# Altium PCB SuperCap-NEW_V1.4.PcbDoc
Units mm, origin at the board's own origin, x right, y up, seen from the top; angles counter-clockwise.
Board outline 100 x 75 mm, 4 copper layers (Top Layer, Signal Layer 1, Signal Layer 2, Bottom Layer), stack 0.778 mm thick; 110 components, 64 nets, 361 pads, 798 vias.
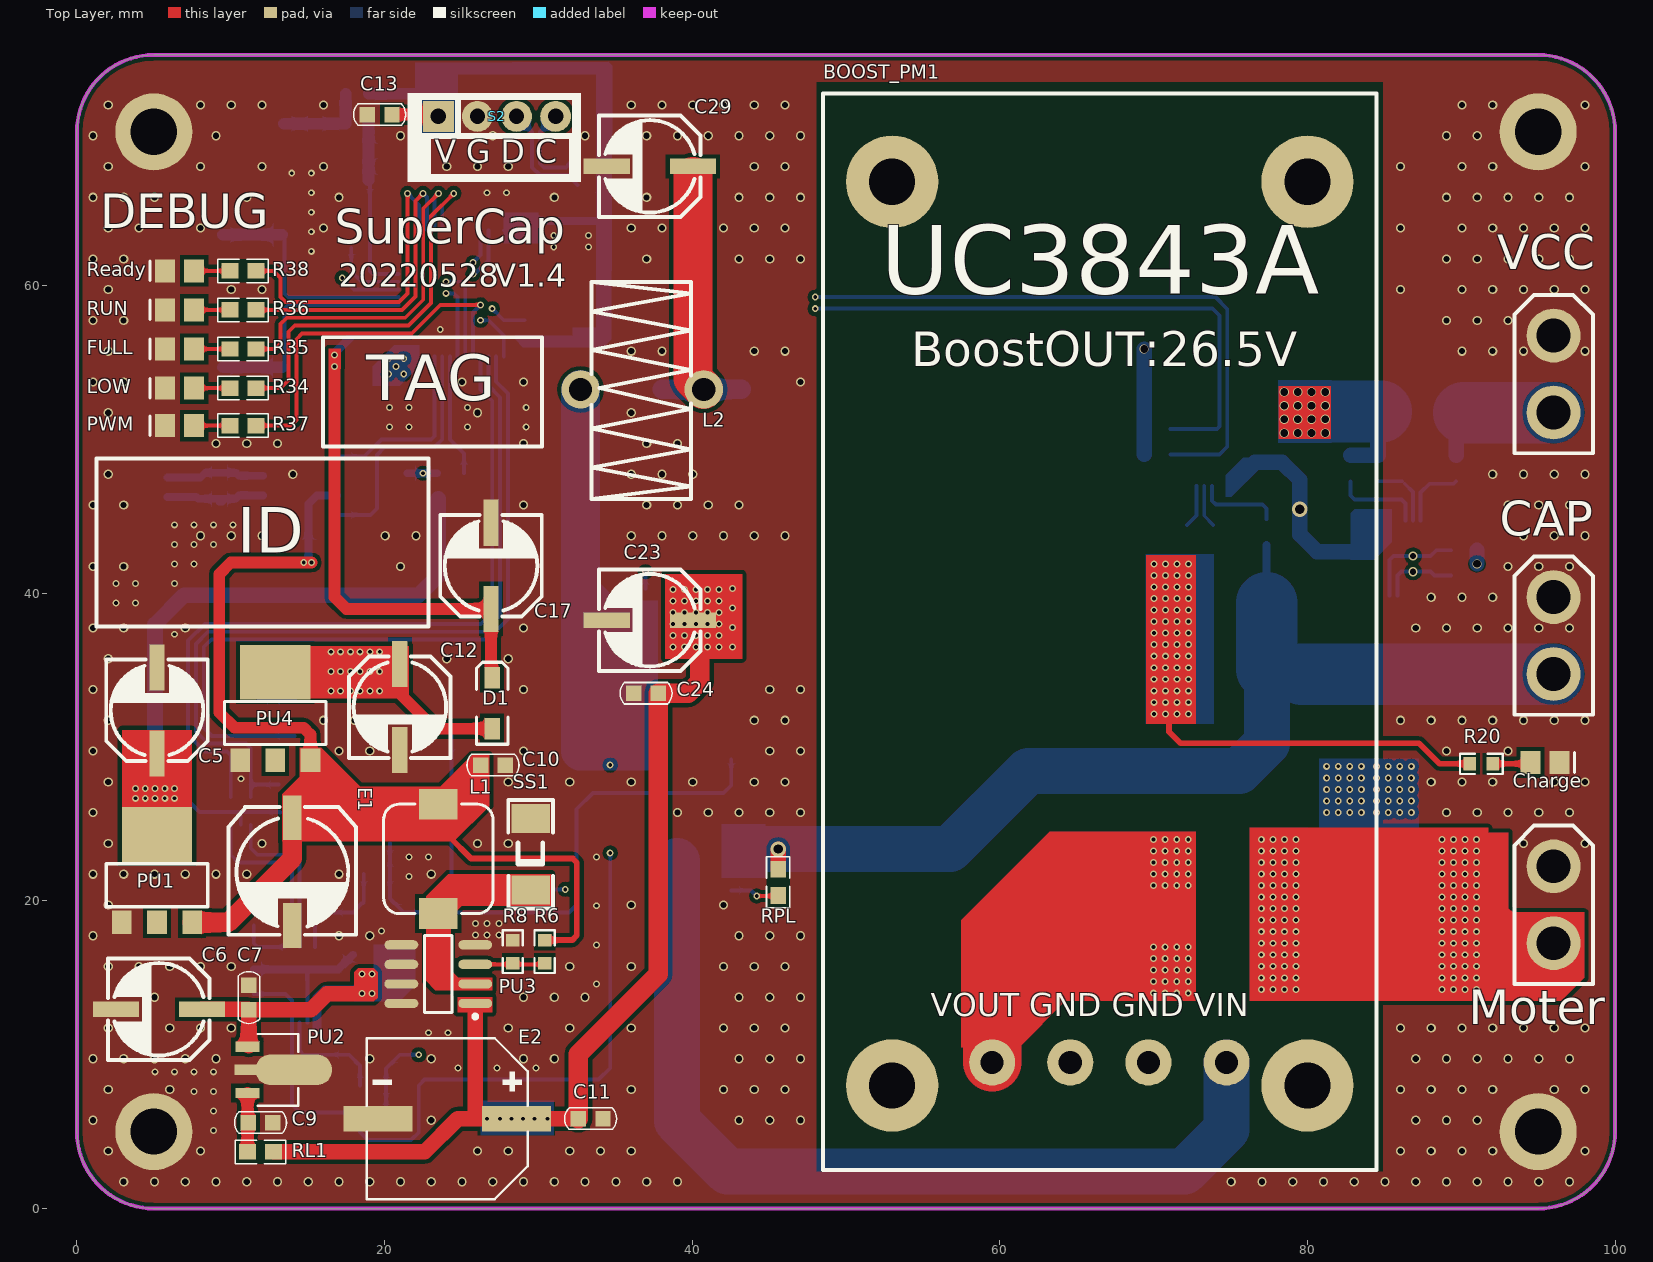
[diagram p0: Top Layer view]
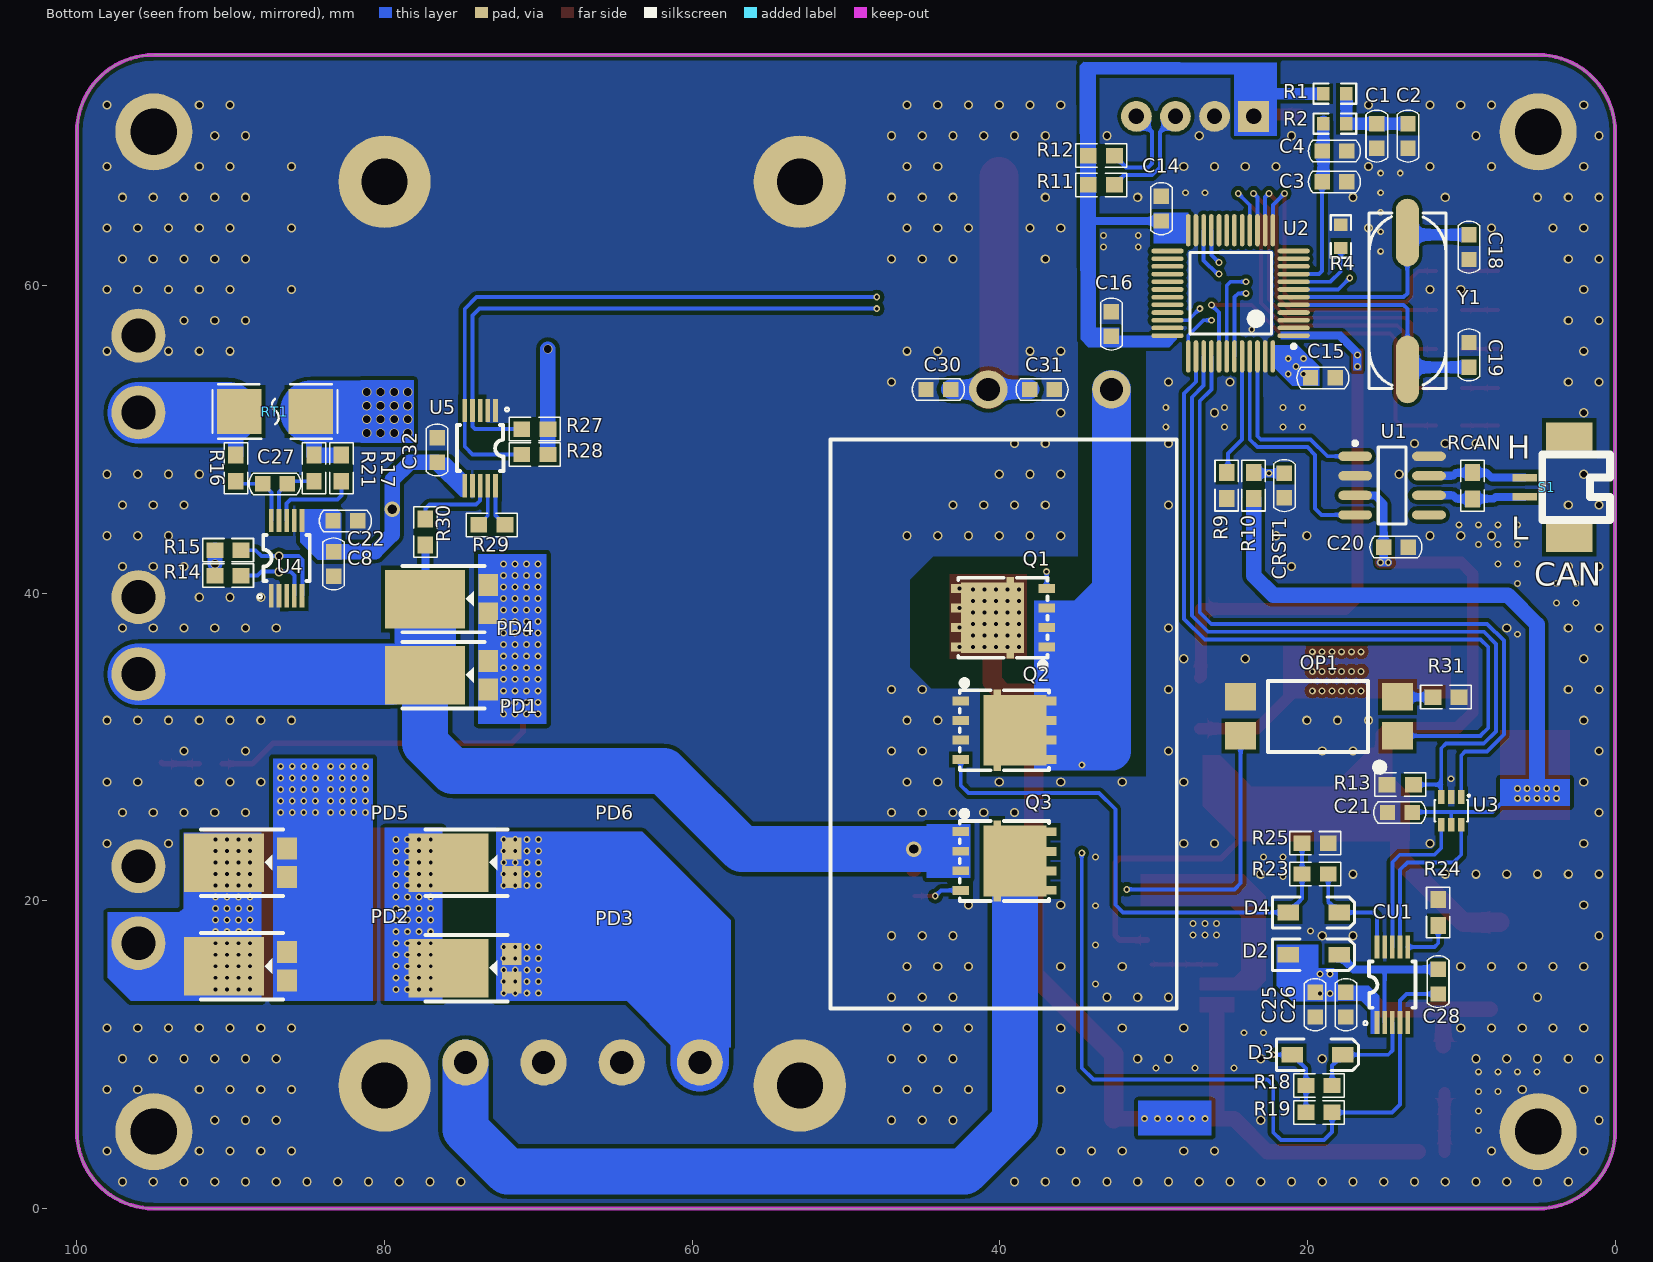
[diagram p1: Bottom Layer view, seen from below]
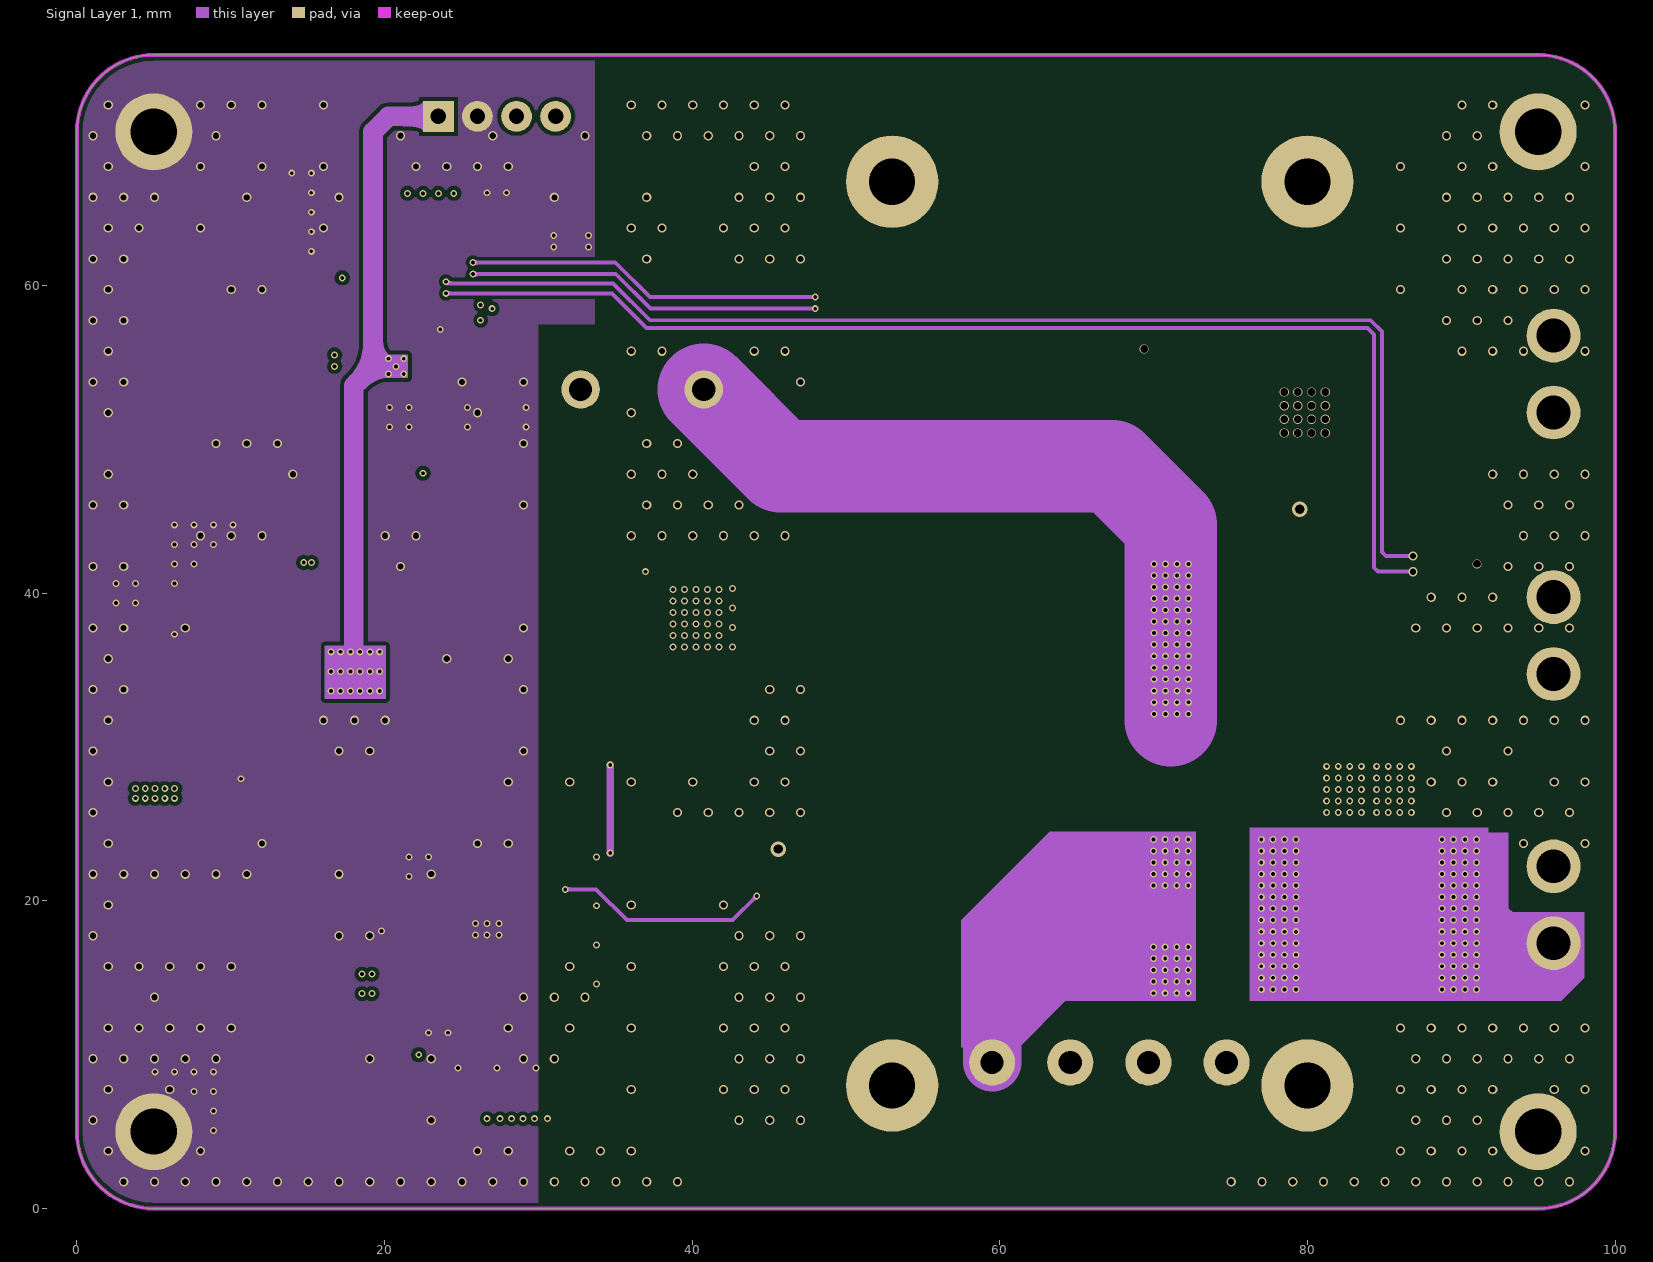
[diagram p2: Signal Layer 1]
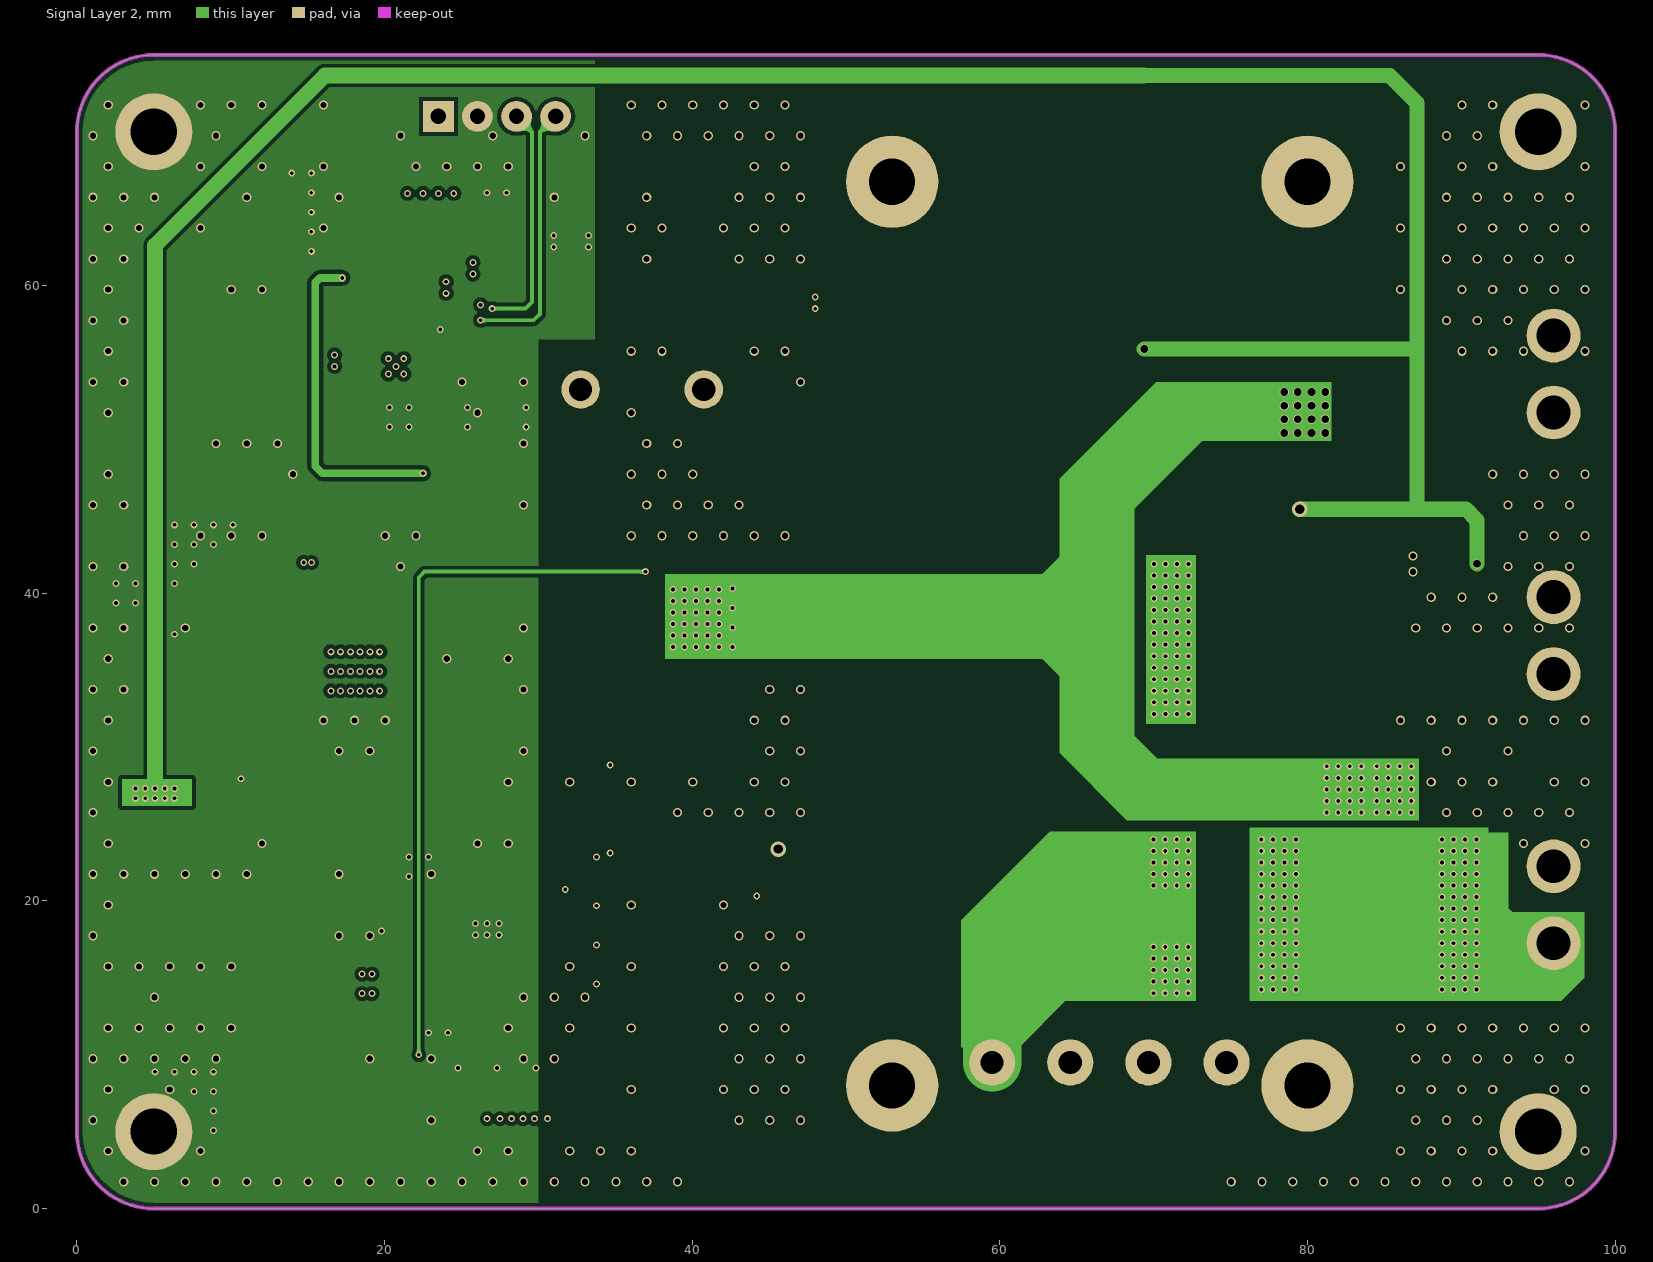
[diagram p3: Signal Layer 2]

## Layer stack, top to bottom
Top Solder: solder mask 0.0102, Solder Resist, Dk 3.5
Top Layer: signal copper 0.0356
Dielectric 1: core 0.254, FR-4, Dk 4.2
Signal Layer 1: signal copper 0.036
Dielectric 3: prepreg 0.127, Dk 4.2
Signal Layer 2: signal copper 0.036
Dielectric 2: core 0.254, Dk 4.2
Bottom Layer: signal copper 0.0356
Bottom Solder: solder mask 0.0102, Solder Resist, Dk 3.5

## Board outline
0,5 0,70 cw(c5,70) 5,75 95,75 cw(c95,70) 100,70 100,5 cw(c95,5) 95,0 5,0 cw(c5,5)

## Design rules (kind name [scope] priority, off if disabled: settings)
Clearance [All] p1: gap=0.254 ignorepadtopadclearanceinfootprint=FALSE except(0: Arc-Hole Track-Hole SMDPad-Hole THPad-Hole Via-Hole Fill-Hole Poly-Hole Region-Hole Text-Hole)
DiffPairsRouting [All] p1: maxlimit=0.254 minlimit=0.254 mostfreqgap=0.254 toplayer_minwidth=0.127 toplayer_maxwidth=0.381 toplayer_prefwidth=0.381 midlayer1_minwidth=0.127 midlayer1_maxwidth=0.381 midlayer1_prefwidth=0.381 midlayer2_minwidth=0.127 midlayer2_maxwidth=0.381 midlayer2_prefwidth=0.381 bottomlayer_minwidth=0.127 bottomlayer_maxwidth=0.381 bottomlayer_prefwidth=0.381 maxuncoupledlength=12.7
PlaneConnect [All] p1: planeconnectstyle=Direct reliefexpansion=0.508 reliefentries=4 reliefconductorwidth=0.254 reliefairgap=0.254
PolygonConnect [All] p1: connectstyle=Direct reliefconductorwidth=0.254 reliefentries=4 polygonreliefangle="90 Angle" airgapwidth=0.254
RoutingVias [All] p1: holewidth=0.711 width=1.27 viastyle="Through Hole" minholewidth=0.711 minwidth=1.27 maxholewidth=0.711 maxwidth=1.27
SolderMaskExpansion [All] p1: expansion=0.102 istentingtop=FALSE
Width [All] p1: maxlimit=25.4 minlimit=0.127 preferedwidth=0.254 minimp=50.000000 maximp=50.000000 favimp=50.000000
28 further rules are at their usual default settings.

## Components (designator, comment, footprint, x,y, rotation, side; value= is the part's Value field where it differs from the comment)
BOOST_PM1 "Boost" Boost_Block 53.5,7.5 r0 top locked
C1 "1uF" 0603C 15.494,69.723 r270 bottom
C2 "100nF" 0603C 13.462,69.723 r90 bottom
C3 "1uF" 0603C 18.25,66.75 r0 bottom
C4 "100nF" 0603C 18.25,68.75 r0 bottom
C5 "Cap Pol1" CAP-SMD_BD6.3-L6.6-W6.6-FD 5.207,32.385 r90 top
C6 "220uF/16V" CAP-SMD_BD6.3-L6.6-W6.6-FD 5.334,12.954 r180 top
C7 "100nF" 0603C 11.176,13.716 r270 top
C8 "100nF" 0603C 83.312,41.91 r90 bottom
C9 "104" 0603C 11.938,5.588 r0 top
C10 "100nF" 0603C 27.051,28.829 r0 top
C11 "104" 0603C 33.401,5.842 r0 top
C12 "220uF" CAP-SMD_BD6.3-L6.6-W6.6-FD 21,32.6 r270 top
C13 "100nF" 0603C 19.685,71.12 r0 top
C14 "100nF" 0603C 29.5,65 r270 bottom
C15 "100nF" 0603C 19,54 r0 bottom
C16 "100nF" 0603C 32.75,57.5 r270 bottom
C17 "470uF/10V" CAP-SMD_BD6.3-L6.6-W6.6-FD 26.924,41.783 r90 top
C18 "20P" 0603C 9.5,62.5 r270 bottom
C19 "20P" 0603C 9.5,55.5 r90 bottom
C20 "104" 0603C 14.25,43 r180 bottom
C21 "Cap" 0603C 14,25.75 r0 bottom
C22 "100nF" 0603C 82.55,44.704 r0 bottom
C23 "47uF/35V" CAP-SMD_BD6.3-L6.6-W6.6-FD 37.25,38.25 r180 top
C24 "50V 10uf" 0603C 37,33.5 r0 top
C25 "25V 10uf" 0603C 19.5,13.25 r90 bottom
C26 "100nF" 0603C 17.5,13.25 r90 bottom
C27 "100nF" 0603C 87.122,47.117 r0 bottom
C28 "100nF" 0603C 11.5,14.75 r90 bottom
C29 "47uF/35V" CAP-SMD_BD6.3-L6.6-W6.6-FD 37.25,67.75 r180 top
C30 "50V 10uf" 0603C 44,53.25 r180 bottom
C31 "50V 10uf" 0603C 37.25,53.25 r0 bottom
C32 "100nF" 0603C 76.581,49.315 r270 bottom
CAP "XT30" XT30 96,34.75 r90 top (schematic designator Cap1)
Charge "绿色" LED_0805 94.5,29 r0 top (schematic designator LED4)
CRST1 "100nF" 0603C 21.5,47 r90 bottom
CU1 "LM5106" MSOP_10 15.5,12.141 r180 bottom
D1 "14007" SOD123 27,31.2 r90 top
D2 "MBR0540TIG" SOD123 21.25,16.5 r180 bottom
D3 "IN4148WS" SOD123 21,10 r180 bottom
D4 "IN4148WS" SOD123 21.25,19.25 r180 bottom
E1 "Cap Pol1" CAP-SMD_BD8.0-L8.3-W8.3-FD 14,21.9 r270 top
E2 "Cap Pol1" "470uF 35V SMT" 28.575,5.842 r180 top
FULL "橙" LED_0805 7.62,55.88 r180 top
L1 "Inductor" "L 6*6" 23.495,19.177 r90 top
L2 "68UH" IND-TH_L14.0-W6.5-P8.00-D0.6 32.75,53.25 r0 top
LOW "红" LED_0805 7.62,53.34 r180 top
Moter "XT30" XT30 96,17.25 r90 top (schematic designator M1)
OP1 "SuperCap_OUT" SOP-4_L6.5-W4.6-P2.54-LS10.2-TL 19.25,32 r0 bottom
PD1 "SB20100" TO-277_3P-L5.4-W4.0-LS6.5-TR 75.311,34.671 r180 bottom
PD2 "SB20100" TO-277_3P-L5.4-W4.0-LS6.5-TR 88.392,15.748 r180 bottom
PD3 "SB20100" TO-277_3P-L5.4-W4.0-LS6.5-TR 73.787,15.621 r180 bottom
PD4 "SB20100" TO-277_3P-L5.4-W4.0-LS6.5-TR 75.311,39.624 r180 bottom
PD5 "SB20100" TO-277_3P-L5.4-W4.0-LS6.5-TR 88.392,22.479 r180 bottom
PD6 "SB20100" TO-277_3P-L5.4-W4.0-LS6.5-TR 73.787,22.479 r180 bottom
PU1 "AMS1117-3.3" SOT-223 5.207,21.463 r90 top
PU2 "78L05" SOT-89-3_L4.5-W2.5-P1.50-LS4.2-BR 12.446,9.017 r180 top
PU3 "XL1509-ADJ/5V0" "SOP8 N" 23.495,15.24 r180 top
PU4 "AMS1117-3.3" SOT-223 12.9,32 r90 top
PWM "白" LED_0805 7.62,50.9 r180 top
Q1 "BSC109N10NS3" PDFN-8_L4.9-W5.8-P1.27-LS6.1-BL_2 37,36.5 r90 bottom
Q2 "BSC109N10NS3" PDFN-8_L4.9-W5.8-P1.27-LS6.1-BL_2 42.5,33 r270 bottom
Q3 "HYG210P06LQ1C2" MOS_PQFN 42.5,24.5 r270 bottom
R1 "0R" R0603 18.923,72.39 r180 bottom
R2 "47R" R0603 17.526,70.612 r0 bottom
R4 "0R" R0603 17.75,62.5 r90 bottom
R6 "Res1" R0603 30.5,16 r90 top
R8 "Res1" R0603 28.25,17.397 r270 top
R9 "10K" 0603-1 25.25,47 r270 bottom
R10 "10K" 0603-1 23.5,47 r270 bottom
R11 "10K" 0603-1 33.401,66.548 r180 bottom
R12 "10K" 0603-1 33.401,68.453 r180 bottom
R13 "Res2" 0603-1 13.97,27.559 r0 bottom
R14 "4.7K" 0603-1 90.17,41.148 r180 bottom
R15 "4.7K" 0603-1 90.17,42.799 r180 bottom
R16 "5.1Ω" 0603-1 89.662,48.133 r90 bottom
R17 "Res2" 0603-1 82.804,48.133 r270 bottom
R18 "10Ω" 0603-1 19.25,8 r0 bottom
R19 "10K" 0603-1 19.25,6.25 r180 bottom
R20 "10K" R0603 92,29 r180 top
R21 "5.1Ω" 0603-1 84.582,48.133 r90 bottom
R23 "10Ω" 0603-1 19.5,21.75 r0 bottom
R24 "47K" 0603-1 11.5,19.25 r90 bottom
R25 "10K" 0603-1 19.5,23.75 r180 bottom
R27 "4.7K" 0603-1 70.231,50.673 r0 bottom
R28 "4.7K" 0603-1 70.231,49.022 r0 bottom
R29 "5.1Ω" 0603-1 73.025,44.45 r0 bottom
R30 "Res2" 0603-1 77.343,43.981 r90 bottom
R31 "1K" 0603-1 11,33.25 r180 bottom
R34 "Res2" 0603-1 10.795,53.34 r180 top
R35 "Res2" 0603-1 10.795,55.88 r0 top
R36 "Res2" 0603-1 10.795,58.42 r0 top
R37 "Res2" 0603-1 10.795,50.9 r0 top
R38 "Res2" 0603-1 10.795,60.96 r0 top
RCAN "Res2" 0603-1 9.271,46.99 r270 bottom
Ready "蓝" LED_0805 7.62,60.96 r180 top
RL1 "47R" 0603-1 11.938,3.683 r180 top
RPL "1K" 0603-1 45.593,21.209 r270 top
RT1 "2512 5mΩ 2W" "FUSE-SMD_L6.1-W2.7 - duplicate" 87.122,51.816 r180 bottom
RUN "绿" LED_0805 7.62,58.42 r180 top
S1 "CAN通信" 1.25_2Pin 5.886,47.517 r270 bottom
S2 "程序下载" S-4 23.5,71 r90 top
SS1 "D Schottky" 贴片M7 29.591,22.733 r0 top
U1 "TJA1050" "SOP8 N" 14.5,47 r180 bottom
U2 "STM32F103C8T6" LQFP-48_M 25,59.5 r0 bottom
U3 "SN74LVC2G17" SOT-363_L2.0-W1.3-P0.65-LS2.1-BR 10,26.75 r90 bottom
U4 "INA226" MSOP_10 87.376,39.878 r180 bottom
U5 "INA226" MSOP_10 72.771,51.855 r0 bottom
VCC "XT30" XT30 96,51.75 r90 top (schematic designator VCC1)
Y1 "8MHz" X-SM49 13.5,59 r90 bottom

## Footprints (in the part's own frame and the unit in brackets; to place one, negate y for a bottom-side part, rotate by r counter-clockwise, add the part's x,y. Pads: shape width x height; smd on the part's side, far side on the other; paste and mask are expansions set on the pad)
1.25_2Pin [mm]
  rect 2.1x3 smd: 0(-2.55,2.9) 0(3.8,2.9)
  rect 0.5x1.6 smd: 1(0,0) 2(1.25,0)
  silkscreen extent -1.5,1.15 2.75,5.55
"470uF 35V SMT" [mm]
  rect 4.5x1.65 smd: 1(0,0) 2(9,0)
  silkscreen extent -0.73,-5.23 9.73,5.23
0603-1 [mm] "贴片带丝印"
  rect 1.1x1 smd: 1(-0.85,0) 2(0.85,0)
  silkscreen extent -1.65,-0.76 1.65,0.76, body extent -1.14,-0.38 1.14,0.38, height 1
0603C [mm]
  rect 1x1 smd: 1(0.8,0) 2(-0.8,0)
  silkscreen extent -1.69,-0.7 1.69,0.7
Boost_Block [mm]
  round 3 hole 1.5: 1(6,2) 2(11.08,2) 3(16.16,2) 4(21.24,2)
  round 6 hole 3: 5(-0.5,0.5) 6(26.5,0.5) 7(26.5,59.25) 8(-0.5,59.25)
  silkscreen extent -5,-5 31,65
CAP-SMD_BD6.3-L6.6-W6.6-FD [mm]
  rect 3x1 smd: 1(-2.8,0) 2(2.8,0)
  silkscreen extent -3.3,-3.3 3.3,3.3
CAP-SMD_BD8.0-L8.3-W8.3-FD [mm]
  rect 2.901x1.199 smd: 1(-3.5,0.005) 2(3.5,-0.005)
  silkscreen extent -4.21,-4.16 4.1,4.15
"FUSE-SMD_L6.1-W2.7 - duplicate" [mm]
  rect 2.91x2.905 smd: 1(-2.33,0) 2(2.33,0)
  silkscreen extent -4.06,-1.78 4.06,1.78
IND-TH_L14.0-W6.5-P8.00-D0.6 [mm]
  round 2.5 hole 1.5: 1(0,0) 2(8,0)
  silkscreen extent 0.7,-7.11 7.17,6.98
"L 6*6" [mm]
  rect 2x2.5 smd: 1(0,0) 2(7.112,0)
  silkscreen extent 0,-3.56 7.11,3.56, body extent 0,-3.56 7.11,3.56, height 4
LED_0805 [mm]
  rect 1.3x1.5 smd: 1(0,0) 2(1.9,0)
  silkscreen extent 2.86,-0.64 2.86,0.64
LQFP-48_M [mm] "Thin QFP, 48-Leads, Body 7x7mm, Pitch 0.5mm, IPC Low Density"
  oval 2.1x0.3 smd: 1(-4.1,2.75) 2(-4.1,2.25) 3(-4.1,1.75) 4(-4.1,1.25) 5(-4.1,0.75) 6(-4.1,0.25) 7(-4.1,-0.25) 8(-4.1,-0.75) 9(-4.1,-1.25) 10(-4.1,-1.75) 11(-4.1,-2.25) 12(-4.1,-2.75) 25(4.1,-2.75) 26(4.1,-2.25) 27(4.1,-1.75) 28(4.1,-1.25) 29(4.1,-0.75) 30(4.1,-0.25) 31(4.1,0.25) 32(4.1,0.75) 33(4.1,1.25) 34(4.1,1.75) 35(4.1,2.25) 36(4.1,2.75)
  oval 0.3x2.1 smd: 13(-2.75,-4.1) 14(-2.25,-4.1) 15(-1.75,-4.1) 16(-1.25,-4.1) 17(-0.75,-4.1) 18(-0.25,-4.1) 19(0.25,-4.1) 20(0.75,-4.1) 21(1.25,-4.1) 22(1.75,-4.1) 23(2.25,-4.1) 24(2.75,-4.1) 37(2.75,4.1) 38(2.25,4.1) 39(1.75,4.1) 40(1.25,4.1) 41(0.75,4.1) 42(0.25,4.1) 43(-0.25,4.1) 44(-0.75,4.1) 45(-1.25,4.1) 46(-1.75,4.1) 47(-2.25,4.1) 48(-2.75,4.1)
  silkscreen extent -4.22,-2.65 2.65,3.57, body extent -3.5,-3.5 3.5,3.5, height 1.6
MOS_PQFN [mm]
  rect 0.58x1.079 smd: 1(3.81,-0.041) 3(0,-0.041) 3(1.27,-0.041) 3(2.54,-0.041)
  rect 0.95x0.5 smd: 2(-0.264,2.329) 2(4.074,2.329)
  rect 0.58x1.08 smd: 2(0.005,5.629) 2(1.275,5.629) 2(2.545,5.629) 2(3.805,5.629)
  rect 4.6x4.1 smd: 2(1.905,3.489)
  silkscreen extent -1.29,-0.1 4.5,5.7
MSOP_10 [mil]
  rect 12x59.06 smd: 1(0.63,-1.5) 2(20.32,-1.5) 3(40,-1.5) 4(59.69,-1.5) 5(79.37,-1.5) 6(79.37,191.5) 7(59.69,191.5) 8(40,191.5) 9(20.32,191.5) 10(0.63,191.5)
  silkscreen extent -34,-8 99,154
PDFN-8_L4.9-W5.8-P1.27-LS6.1-BL_2 [mm]
  rect 0.58x1.079 smd: 1(3.81,-0.041) 3(0,-0.041) 3(1.27,-0.041) 3(2.54,-0.041)
  rect 0.95x0.5 smd: 2(-0.264,2.329) 2(4.074,2.329)
  rect 0.58x1.08 smd: 2(0.005,5.629) 2(1.275,5.629) 2(2.545,5.629) 2(3.805,5.629)
  rect 4.6x4.1 smd: 2(1.905,3.489)
  silkscreen extent -1.29,-0.1 4.5,5.7
R0603 [mm]
  rect 0.806x0.864 smd: 1(-0.055,0.085) 2(1.452,0.085)
  silkscreen extent -0.69,-0.58 2.08,0.75
S-4 [mm]
  rect 2x2 hole 1: 1(0,0)
  round 2 hole 1: 2(0,-2.54) 3(0,-5.08) 4(0,-7.62)
  silkscreen extent -1.27,-8.89 1.27,1.27
SOD123 [mil]
  rect 55x40 smd: 1(0,0) 2(130,0)
  silkscreen extent -40,-40 170,40
"SOP8 N" [mm]
  oval 2.2x0.6 smd: 1(-2.4,1.905) 2(-2.4,0.635) 3(-2.4,-0.635) 4(-2.4,-1.905) 5(2.4,-1.905) 6(2.4,-0.635) 7(2.4,0.635) 8(2.4,1.905)
  silkscreen extent -2.53,-2.5 0.9,2.88, body extent -1.95,-2.45 1.95,2.45, height 1.75
SOP-4_L6.5-W4.6-P2.54-LS10.2-TL [mm]
  rect 2x1.8 smd: 1(-5.1,1.27) 2(-5.1,-1.27) 3(5.1,-1.27) 4(5.1,1.27)
  silkscreen extent -4.42,-2.29 3.32,3.79
SOT-89-3_L4.5-W2.5-P1.50-LS4.2-BR [mm]
  rect 1.575x0.672 smd: 1(1.356,-1.5) 2(1.397,0) 3(1.356,1.5)
  oval 5x2 smd: 2(-1.651,0)
  silkscreen extent -1.95,-2.33 0.7,2.33
SOT-223 [mil] "稳压管"
  rect 60x50 smd: 1(-112.5,90) 3(-112.5,-90) ""(-112.5,0)
  rect 140x180 smd: 2(112.5,0)
  silkscreen extent -72,-130 38,130
SOT-363_L2.0-W1.3-P0.65-LS2.1-BR [mm]
  rect 0.9x0.4 smd: 1(0,0) 2(0,0.65) 3(0,1.3) 4(-1.8,1.3) 5(-1.8,0.65) 6(-1.8,0)
  silkscreen extent -1.6,-0.56 0.16,1.75
TO-277_3P-L5.4-W4.0-LS6.5-TR [mm]
  rect 1.29x1.422 smd: 1(2.054,-0.92) 1(2.054,0.92)
  rect 5.2x3.8 smd: 2(-2.054,0)
  silkscreen extent -3.54,-2.16 1.8,2.16
X-SM49 [mm]
  oval 4.4x1.5 smd: 1(4.45,0.004) 2(-4.45,-0.004)
  silkscreen extent -5.7,-2.5 5.72,2.5
XT30 [mm]
  round 3.5 hole 2.2: 1(0,0) 2(5,0)
  silkscreen extent -2.65,-2.55 7.65,2.55
贴片M7 [mm]
  rect 2.5x1.9 smd: 1(-0.1,2.625) 2(-0.091,-2.025)
  silkscreen extent -1.55,-3.22 1.36,3.82

## Part data
C1 C2 C3 C4 C7 C8 C13 C14 C15 C16 C22 C24 C25 C26 C27 C28 C30 C31 C32: library part Cap, "无极性电容"
C5 E1 E2: "Polarized Capacitor (Radial)"
C6 C12 C23 C29: library part "Cap Pol", "极性电解电容"
C9 C10 C11: library part C
C17: library part "Cap Pol1", "Polarized Capacitor (Radial)"
C18 C19 C20 CRST1: library part CAP-1
C21: "Capacitor"
CAP Moter VCC: library part JP-2
Charge FULL LOW PWM Ready RUN: library part LED0, "发光二极管"
CU1 U4 U5: library part Component_1
D1 D4 PD1 PD2 PD3 PD4 PD5 PD6: library part "Diode 1N914", "High Conductance Fast Diode"
D2 D3: library part D-1
L2: library part Inductance
OP1: library part Optoisolator1, "4-Pin Phototransistor Optocoupler"
PU1 PU4: library part LD1117
PU3: library part XL1509-ADJ
Q1 Q2: library part NMOS-2, "N-Channel Power MOSFET"
Q3: library part PMOS-2, "P-Channel Power MOSFET"
R1 R2 R4 R14 R15 R16 R18 R19 R20 R21 R23 R24 R25 R27 R28 R29 R31 RL1 RPL RT1: library part Res1, "贴片电阻"
R6 R8 R13 R17 R30 R34 R35 R36 R37 R38 RCAN: "Resistor"
R9 R10 R11 R12: library part R
S1: library part S-2
S2: library part S-4
SS1: "Schottky Diode"
U1: library part 24C02
Y1: library part XTAL, "Crystal Oscillator"

## Free pads (board coordinates)
  round 5 hole 3: 0(5,5) 0(5,70) 0(95,5) 0(95,70)

## Via types
v1: diameter 0.45, hole 0.25, Top Layer to Bottom Layer, tented both sides, 414 vias
v2: diameter 0.6, hole 0.4, Top Layer to Bottom Layer, tented both sides, 362 vias
v3: diameter 0.6, hole 0.5, Top Layer to Bottom Layer, tented both sides, 16 vias
v4: diameter 0.6, hole 0.4, Top Layer to Bottom Layer, 2 vias
v5: diameter 1, hole 0.6, Top Layer to Bottom Layer, 2 vias
v6: diameter 0.6, hole 0.5, Top Layer to Bottom Layer, 2 vias

## Nets (pads, with @x,y where several pads share a name; then routed paths per layer and width w, separated by ;. In a path a pad name is that pad's centre, name@x,y a point inside that pad or via, vN(x,y) a via of type N, cw(c..) or ccw(c..) an arc to the next point about the centre after c; other vN are vias at no path point)
3.3V: C5.1 C8.1 C21.2 C22.1 C32.1 PU1.2 R10.2 R14.1 R15.1 R27.1 R28.1 U3.5 U4.6 U5.6 | length 243.8
  Signal Layer 2 w1: 69.342,73.66 85.344,73.66 87.122,71.882 87.122,55.88 ; v6(69.381,55.88) 87.122,55.88 ; v5(79.502,45.466) 90.297,45.466 91.02,44.743 v6(91.02,41.91) ; 87.122,45.466 87.122,55.88
  Signal Layer 2 w1.016: v1(5.08,26.67) v1(5.08,27.305) 5.08,62.611 16.129,73.66 69.342,73.66
  Bottom Layer w0.254: 7,26.75 7.969,25.781 13.2,25.781 C21.2 ; U3.5 10.65,25.681
  Bottom Layer w1: R28.1 R27.1 v6(69.381,55.88) ; C32.1 78.358,48.515 79.502,47.371 v5(79.502,45.466) 79.502,43.815 80.607,42.71 C8.1 ; v6(91.02,41.91) R15.1
  Bottom Layer w1.016: v1(5.08,27.305) 5.08,37.973 6.985,39.878 22.225,39.878 23.5,41.153 R10.2
  other v1: 3.81,26.67 4.445,26.67 5.715,26.67 6.35,26.67 3.81,27.305 4.445,27.305 5.715,27.305 6.35,27.305
3.3V_MCU: C12.1 C13.1 C14.1 C15.1 C16.1 D1.1 PU4.2 R1.1 R11.1 R12.1 S2.1 U2.24 U2.36 U2.48 | length 75.6
  Top Layer w0.762: C13.1 23.38,71.12 S2.1 ; C12.1 21,33.483 23.283,31.2 D1.1
  Signal Layer 1 w1.27: 18.009,34.29 18.009,53.496 19.25,54.737 ; v1(20.752,54.737) 19.25,54.737 ; S2.1 20.25,71 19.25,70 19.25,54.737
  Bottom Layer w0.508: C14.1 34,64.2 ; C16.1 33.7,56.7 34.055,57.055 R12.1@34.055,68.585
  Bottom Layer w0.762: R1.1 22.775,72.475
  other v1: 16.51,33.655 17.145,33.655 17.78,33.655 18.415,33.655 19.05,33.655 19.685,33.655 16.51,34.925 17.145,34.925 17.78,34.925 18.415,34.925 19.05,34.925 19.685,34.925 16.51,36.195 17.145,36.195 17.78,36.195 18.415,36.195 19.05,36.195 19.685,36.195 20.25,54.25 21.25,54.25 20.25,55.25 21.25,55.25
5V: C10.2 C20.2 E1.1 L1.2 PU1.3 PU4.3 R6.2 U1.3 | length 56.5
  Top Layer w0.381: 24.194,24.194 25.637,22.75 32.25,22.75 32.5,22.5 32.5,17.75 32.202,17.452 R6.2
  Top Layer w0.762: PU4.3 15.186,30.814 14.75,31.25 10.25,31.25 9.25,32.25 9.25,41.25 10,42 v1(14.75,42) v1(15.25,42)
  Top Layer w1.27: PU1.3 9.843,18.606 14.005,22.768 E1.1
  Bottom Layer w0.508: v1(14.75,42) v1(15.25,42) ; 15.05,42.2 C20.2 15.05,45.8 15.615,46.365 U1.3
12V: C6.1 C7.1 C25.1 C26.1 CU1.1 D2.1 PU2.1 | length 15.7
  Top Layer w1.016: C6.1 11.138,12.954 C7.1 ; PU2.1@11.176,10.603 C7.1 ; v1(18.542,13.97) 16.256,13.97 15.202,12.916 C7.1
  Bottom Layer w0.254: C26.1 17.229,14.05 17.494,14.09 C26.1@17.5,14.091
  Bottom Layer w0.762: C26.1@17.5,14.091 C25.1@19.5,14.091
  other v1: 19.177,13.97 18.542,15.24 19.177,15.24
B_LED: R38.2 U2.13 | length 20.9
  Top Layer w0.254: R38.2 12.79,60.96 13.25,60.5 13.25,59.25 13.572,58.928 20.928,58.928 21.5,59.5 v1(21.5,66)
  Bottom Layer w0.254: v1(21.5,66) 22.25,65.25 U2.13
BATTERY: R16.2 RT1.1 VCC.1 | length 8.5
  Bottom Layer w1.016: R16.2 RT1.1@89.662,51.606
  Bottom Layer w4: RT1.1@90.17,51.75 VCC.1
BATTERY_OUT: C11.2 C23.1 C24.1 E2.1 PD2.1 PD5.1 PU3.1 Q1.2 R17.1 R21.2 RL1.1 RT1.2 | length 72.1
  Top Layer w1.016: RL1.1 22.606,3.683 24.765,5.842 25.895,5.842 ; 25.895,12.855 25.895,5.842 ; C11.2 v1(30.588,5.842) v1(29.75,5.842) v1(29,5.842) E2.1 v1(28.25,5.842) v1(27.5,5.842) v1(26.67,5.842) 25.895,5.842
  Top Layer w1.27: C11.2 32.601,10.041 37.8,15.24 C24.1 39.75,33.5 40.5,34.25 40.5,36.75
  Bottom Layer w1.016: R17.1 R21.2 RT1.2@84.582,51.606
  Bottom Layer w4: 80.137,51.816 RT1.2
  other v1: 81.25,25.75 82,25.75 82.75,25.75 83.5,25.75 84.5,25.75 85.25,25.75 86,25.75 86.75,25.75 81.25,26.5 82,26.5 82.75,26.5 83.5,26.5 84.5,26.5 85.25,26.5 86,26.5 86.75,26.5 81.25,27.25 82,27.25 82.75,27.25 83.5,27.25 84.5,27.25 85.25,27.25 86,27.25 86.75,27.25 81.25,28 82,28 82.75,28 83.5,28 84.5,28 85.25,28 86,28 86.75,28 81.25,28.75 82,28.75 82.75,28.75 83.5,28.75 84.5,28.75 85.25,28.75 86,28.75 86.75,28.75 38.75,36.5 39.5,36.5 40.25,36.5 41,36.5 41.75,36.5 42.629,36.505 38.75,37.25 39.5,37.25 40.25,37.25 41,37.25 41.75,37.25 42.629,37.775 38.75,38 39.5,38 40.25,38 41,38 41.75,38 38.75,38.75 39.5,38.75 40.25,38.75 41,38.75 41.75,38.75 42.629,39.045 38.75,39.5 39.5,39.5 40.25,39.5 41,39.5 41.75,39.5 38.75,40.25 39.5,40.25 40.25,40.25 41,40.25 41.75,40.25 42.629,40.305
  other v3: 78.486,50.419 79.375,50.419 80.264,50.419 81.153,50.419 78.486,51.308 79.375,51.308 80.264,51.308 81.153,51.308 78.486,52.197 79.375,52.197 80.264,52.197 81.153,52.197 78.486,53.086 79.375,53.086 80.264,53.086 81.153,53.086
BOOST_OUT: BOOST_PM1.1 PD3.1 PD6.1 | length 26
  Top Layer w3.81: BOOST_PM1.1 59.5,16
  Signal Layer 1 w3.81: BOOST_PM1.1 59.5,16
  Signal Layer 2 w3.81: BOOST_PM1.1 59.5,16
  Bottom Layer w3.81: BOOST_PM1.1 59.5,16
  other v1: 70,14 70.75,14 71.5,14 72.25,14 70,14.75 70.75,14.75 71.5,14.75 72.25,14.75 70,15.5 70.75,15.5 71.5,15.5 72.25,15.5 70,16.25 70.75,16.25 71.5,16.25 72.25,16.25 70,17 70.75,17 71.5,17 72.25,17 70,21 70.75,21 71.5,21 72.25,21 70,21.75 70.75,21.75 71.5,21.75 72.25,21.75 70,22.5 70.75,22.5 71.5,22.5 72.25,22.5 70,23.25 70.75,23.25 71.5,23.25 72.25,23.25 70,24 70.75,24 71.5,24 72.25,24
"CAN H": RCAN.1 S1.1 U1.7 | length 6.4
  Bottom Layer w0.508: S1.1 8.02,47.517 8.342,47.84 RCAN.1 10.336,47.84 10.541,47.635 U1.7
"CAN L": RCAN.2 S1.2 U1.6 | length 6.8
  Bottom Layer w0.508: S1.2 7.763,46.267 7.89,46.14 RCAN.2 RCAN.2@9.64,46.14 ; RCAN.2@9.271,45.945 9.445,45.945 RCAN.2@9.64,46.14 ; U1.6 10.541,46.365 10.316,46.14 RCAN.2@9.64,46.14
"CAN RX": U1.4 U2.45 | length 16.3
  Bottom Layer w0.254: U1.4 19.095,45.095 19.5,45.5 19.5,49 20,49.5 23.25,49.5 23.75,50 U2.45
"CAN TX": U1.1 U2.46 | length 12.3
  Bottom Layer w0.254: U1.1 18.687,48.905 19.79,50.008 23.04,50.008 23.242,50.21 23.242,52.75 ; 23.246,52.496 23.25,52.5 U2.46
CAP_OUT: OP1.1 U2.38 | length 49.3
  Bottom Layer w0.254: OP1.1 8.75,30.73 8.75,30.75 8.25,31.25 8.25,36.5 8.742,36.992 26.679,36.992 28.016,38.329 28.016,52.984 27.25,53.75 U2.38
ENABLE: CU1.7 U3.6 | length 11.1
  Bottom Layer w0.254: U3.6 10,23 10.508,22.492 13.508,22.492 13.984,22.024 CU1.7@13.984,17.279
G_LED: R36.2 U2.14 | length 20.1
  Top Layer w0.254: R36.2 21.138,58.42 22.008,59.29 22.008,65.508 v1(22.5,66)
  Bottom Layer w0.254: v1(22.5,66) 22.75,65.75 U2.14
GND: BOOST_PM1.2 BOOST_PM1.3 BOOST_PM1.5 BOOST_PM1.6 BOOST_PM1.7 BOOST_PM1.8 C1.1 C2.2 C3.2 C4.2 C5.2 C6.2 C7.2 C8.2 C9.1 C10.1 C11.1 C12.2 C13.2 C14.2 C15.2 C16.2 C17.2 C18.1 C19.1 C20.1 C21.1 C22.2 C23.2 C24.2 C25.2 C26.2 C29.2 C30.2 C31.2 C32.2 CAP.2 Charge.2 CRST1.2 CU1.9 E1.2 E2.2 FULL.2 LOW.2 Moter.2 OP1.3 pad.0 PU1.1 PU2.2 PU3.4 PU3.5 PU3.6 PU3.7 PU3.8 PU4.1 PWM.2 Q2.3 R4.2 R8.1 R9.2 R13.2 R24.2 R25.2 R31.2 Ready.2 RUN.2 S2.2 SS1.1 U1.2 U1.8 U2.23 U2.35 U2.47 U3.2 U4.1 U4.2 U4.7 U5.1 U5.2 U5.7 VCC.2
  other v1: 8.89,5.08 8.89,6.35 7.62,7.62 8.89,7.62 5.08,8.89 6.35,8.89 7.62,8.89 8.89,8.89 24.765,9.144 27.305,9.144 29.845,9.144 22.86,11.43 24.13,11.43 33.782,14.605 33.782,17.145 25.908,17.78 26.67,17.78 27.432,17.78 19.812,18.034 25.908,18.542 26.67,18.542 27.432,18.542 33.782,19.685 21.59,21.59 21.59,22.86 22.86,22.86 33.782,22.86 10.668,27.94 6.35,37.338 2.54,39.37 3.81,39.37 2.54,40.64 3.81,40.64 6.35,40.64 6.35,41.91 7.62,41.91 6.35,43.18 7.62,43.18 8.89,43.18 6.35,44.45 7.62,44.45 8.89,44.45 10.16,44.45 20.32,50.8 21.59,50.8 25.4,50.8 29.21,50.8 20.32,52.07 21.59,52.07 25.4,52.07 29.21,52.07 23.622,57.15 15.24,62.23 31,62.5 33.25,62.5 31,63.25 33.25,63.25 15.24,63.5 15.24,64.77 15.24,66.04 26.67,66.04 27.94,66.04 13.97,67.31 15.24,67.31
  other v2: 3.04,1.739 5.04,1.739 7.04,1.739 9.04,1.739 11.04,1.739 13.04,1.739 15.04,1.739 17.04,1.739 19.04,1.739 21.04,1.739 23.04,1.739 25.04,1.739 27.04,1.739 29.04,1.739 31.04,1.739 33.04,1.739 35.04,1.739 37.04,1.739 39.04,1.739 75.04,1.739 77.04,1.739 79.04,1.739 81.04,1.739 83.04,1.739 85.04,1.739 87.04,1.739 89.04,1.739 91.04,1.739 93.04,1.739 95.04,1.739 97.04,1.739 2.04,3.739 8.04,3.739 26.04,3.739 28.04,3.739 32.04,3.739 34.04,3.739 36.04,3.739 86.04,3.739 88.04,3.739 90.04,3.739 92.04,3.739 98.04,3.739 1.04,5.739 23.04,5.739 43.04,5.739 45.04,5.739 47.04,5.739 87.04,5.739 89.04,5.739 91.04,5.739 2.04,7.739 6.04,7.739 36.04,7.739 42.04,7.739 44.04,7.739 46.04,7.739 86.04,7.739 88.04,7.739 90.04,7.739 92.04,7.739 96.04,7.739 98.04,7.739 1.04,9.739 3.04,9.739 5.04,9.739 7.04,9.739 9.04,9.739 19.04,9.739 23.04,9.739 29.04,9.739 31.04,9.739 43.04,9.739 45.04,9.739 47.04,9.739 87.04,9.739 89.04,9.739 91.04,9.739 93.04,9.739 95.04,9.739 97.04,9.739 2.04,11.739 4.04,11.739 6.04,11.739 8.04,11.739 10.04,11.739 28.04,11.739 32.04,11.739 36.04,11.739 42.04,11.739 44.04,11.739 46.04,11.739 86.04,11.739 88.04,11.739 90.04,11.739 92.04,11.739 94.04,11.739 96.04,11.739 98.04,11.739 5.04,13.739 29.04,13.739 31.04,13.739 33.04,13.739 43.04,13.739 45.04,13.739 47.04,13.739 2.04,15.739 4.04,15.739 6.04,15.739 8.04,15.739 10.04,15.739 32.04,15.739 36.04,15.739 42.04,15.739 44.04,15.739 46.04,15.739 1.04,17.739 17.04,17.739 19.04,17.739 43.04,17.739 45.04,17.739 47.04,17.739 2.04,19.739 36.04,19.739 42.04,19.739 1.04,21.739 3.04,21.739 5.04,21.739 7.04,21.739 9.04,21.739 11.04,21.739 17.04,21.739 23.04,21.739 2.04,23.739 12.04,23.739 26.04,23.739 28.04,23.739 94.04,23.739 98.04,23.739 1.04,25.739 39.04,25.739 41.04,25.739 43.04,25.739 45.04,25.739 47.04,25.739 89.04,25.739 91.04,25.739 93.04,25.739 95.04,25.739 97.04,25.739 2.04,27.739 28.04,27.739 32.04,27.739 36.04,27.739 40.04,27.739 44.04,27.739 46.04,27.739 88.04,27.739 90.04,27.739 92.04,27.739 96.04,27.739 98.04,27.739 1.04,29.739 17.04,29.739 19.04,29.739 29.04,29.739 45.04,29.739 47.04,29.739 89.04,29.739 93.04,29.739 2.04,31.739 16.04,31.739 18.04,31.739 20.04,31.739 44.04,31.739 46.04,31.739 86.04,31.739 88.04,31.739 90.04,31.739 92.04,31.739 94.04,31.739 96.04,31.739 98.04,31.739 1.04,33.739 3.04,33.739 29.04,33.739 45.04,33.739 47.04,33.739 2.04,35.739 24.04,35.739 28.04,35.739 1.04,37.739 3.04,37.739 7.04,37.739 29.04,37.739 87.04,37.739 89.04,37.739 91.04,37.739 93.04,37.739 95.04,37.739 97.04,37.739 88.04,39.739 90.04,39.739 92.04,39.739 1.04,41.739 3.04,41.739 21.04,41.739 93.04,41.739 95.04,41.739 97.04,41.739 8.04,43.739 10.04,43.739 12.04,43.739 20.04,43.739 22.04,43.739 36.04,43.739 38.04,43.739 40.04,43.739 42.04,43.739 44.04,43.739 46.04,43.739 94.04,43.739 96.04,43.739 98.04,43.739 1.04,45.739 3.04,45.739 29.04,45.739 37.04,45.739 39.04,45.739 41.04,45.739 43.04,45.739 93.04,45.739 95.04,45.739 97.04,45.739 2.04,47.739 14.04,47.739 36.04,47.739 38.04,47.739 40.04,47.739 92.04,47.739 94.04,47.739 96.04,47.739 98.04,47.739 9.04,49.739 11.04,49.739 13.04,49.739 29.04,49.739 37.04,49.739 39.04,49.739 2.04,51.739 26.04,51.739 36.04,51.739 1.04,53.739 3.04,53.739 25.04,53.739 29.04,53.739 47.04,53.739 2.04,55.739 36.04,55.739 38.04,55.739 44.04,55.739 46.04,55.739 90.04,55.739 92.04,55.739 94.04,55.739 98.04,55.739 1.04,57.739 3.04,57.739 89.04,57.739 91.04,57.739 93.04,57.739 2.04,59.739 10.04,59.739 12.04,59.739 86.04,59.739 90.04,59.739 92.04,59.739 94.04,59.739 96.04,59.739 98.04,59.739 1.04,61.739 3.04,61.739 37.04,61.739 43.04,61.739 45.04,61.739 47.04,61.739 89.04,61.739 91.04,61.739 93.04,61.739 95.04,61.739 97.04,61.739 2.04,63.739 4.04,63.739 8.04,63.739 16.04,63.739 36.04,63.739 38.04,63.739 42.04,63.739 44.04,63.739 46.04,63.739 86.04,63.739 90.04,63.739 92.04,63.739 94.04,63.739 96.04,63.739 98.04,63.739 1.04,65.739 3.04,65.739 5.04,65.739 11.04,65.739 17.04,65.739 31.04,65.739 37.04,65.739 43.04,65.739 45.04,65.739 47.04,65.739 89.04,65.739 91.04,65.739 93.04,65.739 95.04,65.739 97.04,65.739 2.04,67.739 8.04,67.739 12.04,67.739 16.04,67.739 22.04,67.739 24.04,67.739 26.04,67.739 28.04,67.739 44.04,67.739 46.04,67.739 86.04,67.739 90.04,67.739 92.04,67.739 98.04,67.739 1.04,69.739 9.04,69.739 21.04,69.739 27.04,69.739 33.04,69.739 37.04,69.739 39.04,69.739 41.04,69.739 43.04,69.739 45.04,69.739 47.04,69.739 89.04,69.739 91.04,69.739 2.04,71.739 8.04,71.739 10.04,71.739 12.04,71.739 16.04,71.739 36.04,71.739 38.04,71.739 40.04,71.739 42.04,71.739 44.04,71.739 46.04,71.739 90.04,71.739 92.04,71.739 98.04,71.739
I/O1_PWM: U2.40 U3.1 | length 49.6
  Bottom Layer w0.254: U3.1 10,29.464 9.75,29.714 8.329,29.714 7.234,30.809 7.234,36.921 8.321,38.008 26.258,38.008 27,38.75 27,52.5 26.25,53.25 U2.40
I/O2_ENABLE: R13.1 U2.39 U3.3 | length 52.4
  Bottom Layer w0.254: U3.3 11.3,27.559 ; R13.1 11.3,27.559 ; U2.39 26.75,53.5 27.508,52.742 27.508,38.54 26.468,37.5 8.532,37.5 7.742,36.71 7.742,31.02 8.54,30.222 11,30.222 11.3,29.922 11.3,27.559
"IICI  SCL": R28.2 U2.21 U5.5 | length 65.5
  Signal Layer 1 w0.254: v1(25.75,61.5) 35,61.5 37.25,59.25 v1(48,59.25)
  Bottom Layer w0.254: v1(25.75,61.5) 26.25,62 U2.21 ; v1(48,59.25) 74.024,59.25 74.787,58.487 U5.5 74.787,49.53 74.279,49.022 R28.2
"IICI  SCL_BA": R15.2 U2.42 U4.5 | length 91.2
  Signal Layer 1 w0.254: v1(24,60.25) 24.106,60.144 34.856,60.144 37.25,57.75 84.109,57.75 84.836,57.023 84.836,42.672 85.09,42.418 v4(86.868,42.418)
  Bottom Layer w0.254: v1(24,60.25) 25,60.25 25.25,60 U2.42 ; U4.5@85.326,39.84 85.326,42.164 85.58,42.418 v4(86.868,42.418) 88.011,42.418 88.392,42.799 R15.2
"IICI  SDA": R27.2 U2.22 U5.4 | length 63.4
  Signal Layer 1 w0.254: v1(25.75,60.75) 35.032,60.75 37.282,58.5 v1(48,58.5)
  Bottom Layer w0.254: v1@25.857,60.75 26.75,61.643 U2.22 ; v1(48,58.5) 73.834,58.5 74.287,58.047 U5.4 74.287,50.831 74.283,50.827 ; R27.2 74.121,50.673 74.279,50.831
"IICI  SDA_BA": R14.2 U2.43 U4.4 | length 89.1
  Signal Layer 1 w0.254: v1(24,59.5) 34.782,59.5 37.04,57.242 83.899,57.242 84.328,56.813 84.328,41.656 84.582,41.402 v4(86.868,41.402)
  Bottom Layer w0.254: v1(24,59.5) 24.5,59.5 24.75,59.25 U2.43 ; U4.4 85.86,40.902 ; 85.86,40.781 85.86,40.902 ; R14.2 88.265,41.148 88.011,41.402 v4(86.868,41.402) 86.106,41.402 85.86,41.156 85.86,40.902
MOTER: Moter.1 PD2.2 PD3.2 PD5.2 PD6.2
  other v1: 77,14.25 77.75,14.25 78.5,14.25 79.25,14.25 88.75,14.25 89.5,14.25 90.25,14.25 91,14.25 77,15 77.75,15 78.5,15 79.25,15 88.75,15 89.5,15 90.25,15 91,15 77,15.75 77.75,15.75 78.5,15.75 79.25,15.75 88.75,15.75 89.5,15.75 90.25,15.75 91,15.75 77,16.5 77.75,16.5 78.5,16.5 79.25,16.5 88.75,16.5 89.5,16.5 90.25,16.5 91,16.5 77,17.25 77.75,17.25 78.5,17.25 79.25,17.25 88.75,17.25 89.5,17.25 90.25,17.25 91,17.25 77,18 77.75,18 78.5,18 79.25,18 88.75,18 89.5,18 90.25,18 91,18 77,18.75 77.75,18.75 78.5,18.75 79.25,18.75 88.75,18.75 89.5,18.75 90.25,18.75 91,18.75 77,19.5 77.75,19.5 78.5,19.5 79.25,19.5 88.75,19.5 89.5,19.5 90.25,19.5 91,19.5 77,20.25 77.75,20.25 78.5,20.25 79.25,20.25 88.75,20.25 89.5,20.25 90.25,20.25 91,20.25 77,21 77.75,21 78.5,21 79.25,21 88.75,21 89.5,21 90.25,21 91,21 77,21.75 77.75,21.75 78.5,21.75 79.25,21.75 88.75,21.75 89.5,21.75 90.25,21.75 91,21.75 77,22.5 77.75,22.5 78.5,22.5 79.25,22.5 88.75,22.5 89.5,22.5 90.25,22.5 91,22.5 77,23.25 77.75,23.25 78.5,23.25 79.25,23.25 88.75,23.25 89.5,23.25 90.25,23.25 91,23.25 77,24 77.75,24 78.5,24 79.25,24 88.75,24 89.5,24 90.25,24 91,24
NetBOOST_PM1_4: BOOST_PM1.4 Q3.2 | length 59.5
  Bottom Layer w3: Q3.2@39.011,22.595 39.011,5.693 42.291,2.413 72.009,2.413 74.74,5.144 BOOST_PM1.4
NetC1_2: C1.2 C2.1 R1.2 R2.1 | length 6
  Bottom Layer w0.762: C2.1 13.466,70.527 R2.1 R1.2
NetC9_2: C9.2 PU2.3 RL1.2 | length 3.8
  Top Layer w0.762: RL1.2 11.088,7.515 PU2.3
NetC17_1: C17.1 D1.2 U2.1 | length 30
  Top Layer w0.762: v1(16.75,54.75) 16.75,39.75 17.517,38.983 C17.1 26.924,34.578 D1.2
  other v1: 16.75,55.5
NetC18_2: C18.2 U2.6 Y1.1 | length 15.3
  Bottom Layer w0.254: Y1.1 13.504,59.496 13.75,59.25 U2.6
  Bottom Layer w0.762: C18.2 Y1.1@13.354,63.3
NetC19_2: C19.2 U2.5 Y1.2 | length 15.3
  Bottom Layer w0.254: Y1.2 13.496,58.496 13.75,58.75 U2.5
  Bottom Layer w0.762: C19.2 Y1.2@13.346,54.7
NetC27_1: C27.1 R16.1 U4.10 | length 4.4
  Bottom Layer w0.254: U4.10 87.36,46.555 C27.1 89.496,47.117 R16.1
NetC27_2: C27.2 R21.1 U4.9 | length 4.2
  Bottom Layer w0.254: R21.1 C27.2@86.156,47.283 ; C27.2 86.86,46.579 U4.9
NetC28_1: C28.1 CU1.2 D2.2 | length 10.3
  Bottom Layer w0.254: CU1.2 14.984,15.55
  Bottom Layer w0.508: C28.1 16.998,15.55 D2.2
NetC28_2: C28.2 CU1.4 L2.1 Q1.3 Q2.2 R19.2 | length 78.7
  Signal Layer 1 w0.508: v1(34.671,23.114) v1(34.671,28.829)
  Bottom Layer w0.254: C28.2 13.55,13.95 13.984,13.516 CU1.4 13.984,6.766 14.5,6.25 R19.2 18.4,4.968 18.923,4.445 21.717,4.445 22.225,4.953 22.225,8.001 22.606,8.382 33.909,8.382 34.671,9.144 v1(34.671,23.114)
  Bottom Layer w2.54: 32.75,29.75 L2.1
NetCRST1_1: CRST1.1 R10.1 U2.7 | length 26.9
  Signal Layer 2 w0.508: v1(17.25,60.5) 15.796,60.5 15.494,60.198 15.494,48.26 15.954,47.8 v1(22.5,47.8)
  Bottom Layer w0.254: v1(17.25,60.5) 18,59.75 U2.7
  Bottom Layer w0.508: CRST1.1 v1(22.5,47.8) R10.1@23.41,47.8
NetCU1_3: CU1.3 D3.2 R18.1 | length 7.5
  Bottom Layer w0.254: CU1.3 14.484,10.266 14.75,10 D3.2 18.4,9.298 R18.1
NetCU1_6: CU1.6 R24.1 | length 3.2
  Bottom Layer w0.254: R24.1 11.5,17.25 11.745,17.005 CU1.6
NetCU1_10: CU1.10 D4.2 R23.1 | length 7.3
  Bottom Layer w0.254: CU1.10 15.484,18.984 15.75,19.25 D4.2 18.65,19.952 R23.1
NetD3_1: D3.1 Q1.1 R18.2 R19.1 | length 52.4
  Signal Layer 2 w0.254: v1(22.225,10) 22.225,41.021 22.606,41.402 v1(36.959,41.402)
  Bottom Layer w0.254: R19.1 R18.2 20.1,9.1 D3.1 v1(22.225,10) ; Q1.1 v1(36.959,41.402)
NetD4_1: D4.1 Q2.1 R23.2 R25.1 | length 34.9
  Bottom Layer w0.254: R25.1 R23.2 20.35,20.15 D4.1 31.992,19.25 32.492,19.75 32.492,25.96 33.54,27.008 42.04,27.008 42.541,27.509 Q2.1
NetFULL_1: FULL.1 R35.1 | length 2.3
  Top Layer w0.254: FULL.1 R35.1
NetL1_1: L1.1 PU3.2 SS1.2
NetLED4_1: Charge.1 R20.1 | length 2.5
  Top Layer w0.381: R20.1 94.415,28.915 Charge.1
NetLOW_1: LOW.1 R34.2 | length 2.3
  Top Layer w0.254: LOW.1 R34.2
NetOP1_2: OP1.2 R31.1 | length 2.3
  Bottom Layer w0.508: R31.1 14.13,33.25 OP1.2
NetOP1_4: OP1.4 Q3.1 RPL.2 | length 34.2
  Top Layer w0.254: v1(44.196,20.32) RPL.2@45.554,20.32
  Signal Layer 1 w0.254: v1(31.75,20.75) 33.75,20.75 35.75,18.75 42.626,18.75 v1(44.196,20.32)
  Bottom Layer w0.254: OP1.4 24.35,21.15 24.75,20.75 v1(31.75,20.75) ; Q3.1 43.826,20.69 v1(44.196,20.32)
NetPU3_3: PU3.3 R6.1 R8.2 | length 4.2
  Top Layer w0.254: PU3.3 R6.1@30.129,15.875
NetPWM_1: PWM.1 R37.1 | length 2.3
  Top Layer w0.254: PWM.1 R37.1
NetR9_1: R9.1 U2.44 | length 8
  Bottom Layer w0.254: U2.44 24.25,50 25.165,49.085 R9.1@25.165,47.805
NetR29_1: R29.1 U5.10 | length 2.8
  Bottom Layer w0.254: R29.1 72.787,45.062 U5.10
NetR29_2: R29.2 U5.9 | length 2.8
  Bottom Layer w0.254: U5.9 73.287,45.038 R29.2
NetR36_1: R36.1 RUN.1 | length 2.3
  Top Layer w0.254: RUN.1 R36.1
NetR38_1: R38.1 Ready.1 | length 2.3
  Top Layer w0.254: Ready.1 R38.1
O_LED: R35.2 U2.15 | length 22.8
  Top Layer w0.254: R35.2 12.88,55.88 13.25,56.25 13.25,57.5 13.662,57.912 21.349,57.912 22.516,59.079 22.516,65.016 v1(23.5,66)
  Bottom Layer w0.254: U2.15 23.25,65.75 v1(23.5,66)
POWER_CAP: CAP.1 PD1.2 PD4.2 Q3.3 R30.1 RPL.1 | length 66.2
  Top Layer w1: RPL.1 v5(45.593,23.368)
  Bottom Layer w0.512: PD4.2@77.343,39.646 R30.1
  Bottom Layer w3: 43.942,23.368 v5(45.593,23.368) 56.769,23.368 61.849,28.448 75.565,28.448 77.365,30.248 PD1.2
  Bottom Layer w4: PD4.2@77.343,39.37 PD1.2@77.363,35.052 ; PD1.2@79.629,34.75 CAP.1
POWER_CHARGE: C29.1 C30.1 C31.1 L2.2 PD1.1 PD4.1 R20.2 | length 87.4
  Top Layer w0.381: 71,32 71,31 71.75,30.25 87.25,30.25 88.585,28.915 R20.2
  Top Layer w2.54: 40.05,67.1 40.05,53.95 L2.2
  Signal Layer 1 w6: L2.2 45.74,48.26 67.31,48.26 71.12,44.45 71.12,31.75
  Bottom Layer w1.27: C31.1 L2.2 C30.1
  other v1: 70.013,32.16 70.763,32.16 71.513,32.16 72.263,32.16 70.013,32.91 70.763,32.91 71.513,32.91 72.263,32.91 70.013,33.66 70.763,33.66 71.513,33.66 72.263,33.66 70.013,34.41 70.763,34.41 71.513,34.41 72.263,34.41 70.013,35.16 70.763,35.16 71.513,35.16 72.263,35.16 70.013,35.91 70.763,35.91 71.513,35.91 72.263,35.91 70.013,36.66 70.763,36.66 71.513,36.66 72.263,36.66 70.013,37.41 70.763,37.41 71.513,37.41 72.263,37.41 70.013,38.16 70.763,38.16 71.513,38.16 72.263,38.16 70.013,38.91 70.763,38.91 71.513,38.91 72.263,38.91 70.013,39.66 70.763,39.66 71.513,39.66 72.263,39.66 70.013,40.41 70.763,40.41 71.513,40.41 72.263,40.41 70.013,41.16 70.763,41.16 71.513,41.16 72.263,41.16 70.013,41.91 70.763,41.91 71.513,41.91 72.263,41.91
PWM: CU1.8 U3.4 | length 10.6
  Bottom Layer w0.254: U3.4 11.3,23.45 11.75,23 14,23 14.484,22.516 CU1.8
PWM_LED: R37.2 U2.41 | length 24.5
  Top Layer w0.254: R37.2 13.9,50.9 14.266,51.266 14.266,56.516 14.646,56.896 21.77,56.896 23.624,58.75 v1(26.25,58.75)
  Bottom Layer w0.254: U2.41 25.75,58.25 v1(26.25,58.75)
R_LED: R34.1 U2.16 | length 26
  Top Layer w0.254: R34.1 13.25,53.34 13.758,53.848 13.758,57 14.162,57.404 21.559,57.404 23.024,58.869 23.024,64.524 v1(24.5,66)
  Bottom Layer w0.254: U2.16 23.75,65.25 v1(24.5,66)
SWCLK: R12.2 S2.4 U2.37 | length 26.9
  Signal Layer 2 w0.254: v1(26.25,57.75) 29.683,57.75 30.099,58.166 30.099,69.979 S2.4
  Bottom Layer w0.254: v1(26.25,57.75) 26.75,57.75 27.75,56.75 U2.37 ; S2.4 30.099,69.979 30.099,67.945 30.353,67.691 31.789,67.691 R12.2
SWDIO: R11.2 S2.3 U2.34 | length 24.8
  Signal Layer 2 w0.254: v1(27,58.5) 29.163,58.5 29.591,58.928 29.591,69.989 S2.3
  Bottom Layer w0.254: v1(27,58.5) 27.75,57.75 27.949,57.75 U2.34 ; S2.3 29.591,69.989 29.591,67.691 30.099,67.183 31.916,67.183 R11.2
VBUS_TP: R17.2 U4.8 | length 5.8
  Bottom Layer w0.254: R17.2 82.804,46.355 83.058,46.101 86.106,46.101 86.36,45.847 U4.8
VCAP_TP: R30.2 U5.8 | length 5.4
  Bottom Layer w0.254: U5.8 73.787,46.013 74.041,45.759 77.089,45.759 77.343,45.505 R30.2
VDDA: C3.1 C4.1 R2.2 U2.9 | length 11.5
  Bottom Layer w0.254: C3.1 19.05,60.958 19.25,60.758 ; 19.246,60.754 19.25,60.75 U2.9
  Bottom Layer w0.762: C3.1@18.952,66.848 R2.2@18.952,70.665
VSSA: R4.1 U2.8 | length 4.9
  Bottom Layer w0.254: R4.1 17.835,60.923 18.5,60.258 ; 18.5,60.25 U2.8
pads on no net: CU1.5 PU1. PU4. S1.0 U1.5 U2.2 U2.3 U2.4 U2.10 U2.11 U2.12 U2.17 U2.18 U2.19 U2.20 U2.25 U2.26 U2.27 U2.28 U2.29 U2.30 U2.31 U2.32 U2.33 U4.3 U5.3

## Polygon pours and split planes (outlines as drawn)
GND on Signal Layer 1 "GND_L02_P002" (solid, remove dead copper, pour order 2): 0,75 33.655,75 33.655,57.5 30,57.5 30,2.5 30,0 0,0
GND on Signal Layer 2 "GND_L03_P004" (solid, remove dead copper, pour order 4): 0,75 33.655,75 33.655,56.515 30,56.515 30,0 0,0
GND on Bottom Layer "GND_L04_P006" (solid, remove dead copper, pour order 6): 100,75 0,75 0,0 100,0
GND on Top Layer "GND_L01_P008" (solid, remove dead copper, pour order 8): 0,75 100,75 100,0 0,0

## Keep-outs
Keep-Out Layer:
  the board outline again, w0.254

## Other copper
Top Layer:
  rectangle net BATTERY_OUT: 78.105,50.038 81.534,53.467
  rectangle net 3.3V_MCU: 10.668,33.147 21.59,36.576
  rectangle net 3.3V: 2.921,25.273 7.493,31.115
  rectangle net POWER_CHARGE: 69.5,31.5 72.75,42.5
  region net MOTER: 98,19.25 98,15 96.5,13.5 88,13.5 88,24.436 93.064,24.436 93.064,19.531 93.345,19.25
  region net 12V: 18.034,15.367 18.288,15.621 19.304,15.621 19.558,15.367 19.558,13.716 19.304,13.462 18.034,13.462
  region net NetC17_1: 16.383,55.88 16.383,54.61 17.145,54.61 17.145,55.88
  region net BATTERY_OUT: 24.75,13.75 24.75,12.75 27,12.75 27,13.75
  region net 5V: 14.478,29.972 14.478,28.067 13.335,26.924 13.335,23.876 24.511,23.876 26.797,26.162 26.797,29.464 25.654,29.464 23.622,27.432 18.415,27.432 15.875,29.972
  region net NetL1_1: 27,14.2 27,15 24.8,15 24.3,15.5 24.3,18.966 25.019,19.685 30.839,19.685 30.839,21.739 24.152,21.739 22.7,20.287 22.7,18.6 22.7,14.8 23.3,14.2
  region net BOOST_OUT: 72.75,13.5 64.25,13.5 61.25,10.5 57.5,10.5 57.5,14.75 57.5,18.75 63.25,24.5 72.75,24.5
  region net MOTER: 76.25,24.75 91.75,24.75 91.75,13.5 76.25,13.5
  pour cut-out: 48.1,73.225 48.1,2.425 84.9,2.425 84.9,73.225
  region net BATTERY_OUT: 38.25,41.25 43.25,41.25 43.25,35.75 38.25,35.75
Signal Layer 1:
  rectangle net POWER_CHARGE: 69.5,31.5 72.75,42.5
  region net MOTER: 98,19.25 98,15 96.5,13.5 88,13.5 88,24.436 93.064,24.436 93.064,19.531 93.345,19.25
  region net 3.3V_MCU: 16.129,36.576 16.129,33.147 20.066,33.147 20.066,36.576
  region net BOOST_OUT: 72.75,13.5 64.25,13.5 61.25,10.5 57.5,10.5 57.5,14.75 57.5,18.75 63.25,24.5 72.75,24.5
  region net MOTER: 76.25,24.75 91.75,24.75 91.75,13.5 76.25,13.5
  region net 3.3V_MCU: 21.5,55.5 20,55.5 20,54 21.5,54
Signal Layer 2:
  rectangle net 3.3V: 2.921,26.162 7.493,27.94
  rectangle net POWER_CHARGE: 69.5,31.5 72.75,42.5
  region net MOTER: 98,19.25 98,15 96.5,13.5 88,13.5 88,24.436 93.064,24.436 93.064,19.531 93.345,19.25
  region net BOOST_OUT: 72.75,13.5 64.25,13.5 61.25,10.5 57.5,10.5 57.5,14.75 57.5,18.75 63.25,24.5 72.75,24.5
  region net MOTER: 76.25,24.75 91.75,24.75 91.75,13.5 76.25,13.5
  region net BATTERY_OUT: 87.25,29.25 87.25,25.25 68.25,25.25 63.881,29.619 63.881,47.441 70.161,53.721 81.534,53.721 81.534,49.911 73.161,49.911 68.75,45.5 68.75,30.75 70.25,29.25
  region net BATTERY_OUT: 38.25,35.75 62.75,35.75 65.5,33 65.5,44 62.75,41.25 38.25,41.25
Bottom Layer:
  rectangle net POWER_CHARGE: 69.469,31.496 73.914,42.545
  rectangle net 3.3V: 2.921,26.162 7.493,27.94
  rectangle net 3.3V_MCU: 27.75,62.75 30,64.75
  region net BATTERY_OUT: 78.232,53.848 78.105,53.848 78.105,53.721 78.105,49.784 81.534,49.784 81.534,53.848
  region net MOTER: 98,19.25 98,15 96.5,13.5 88,13.5 88,24.436 93.064,24.436 93.064,19.531 93.345,19.25
  region net 3.3V: 85.471,45.466 83.058,45.466 82.804,45.212 82.804,42.164 84.328,42.164 85.471,43.307
  region net 3.3V: 76.962,48.807 76.962,48.172 75.057,46.267 74.676,46.267 74.676,47.664 75.819,48.807
  region net NetC17_1: 16.5,55.743 16.5,54.5 17.018,54.5 17.018,55.499 18.019,56.5 21.75,56.5 21.75,57 17.757,57
  region net POWER_CAP: 41.91,25 41.91,21.5 44.75,21.5 44.75,25
  region net NetC28_2: 37.75,39.5 37.75,28.5 32.5,28.5 32.5,40.64 34.036,40.64 35.176,39.5
  region net BOOST_OUT: 72.75,13.5 64.25,13.5 61.25,10.5 57.5,10.5 57.5,14.75 57.5,18.75 63.25,24.5 72.75,24.5
  region net 3.3V_MCU: 28.5,56.75 28.25,56.75 33.25,56.75 33.25,56.25 33.25,56 29,56 28.5,56.5
  region net 3.3V_MCU: 19.25,53.5 21,53.5 22.25,54.75 22.25,56.134 20.634,56.134 19.25,54.75
  region net MOTER: 76.25,24.75 76.25,13.5 80,13.5 80,24.75
  region net BATTERY_OUT: 26.25,7 31,7 31,4.75 26.25,4.75
  region net 3.3V_MCU: 33.75,73.75 24.75,73.75 24.75,69.75 22,69.75 22,74.5 34.546,74.546 34.798,74.295 34.75,56.5 34.25,56 32.25,56 32.25,57.25 33.75,57.25
  region net 12V: 15.331,11.348 15.331,13.831 16,14.5 18,14.5 18,13.5 16.5,13.5 15.89,12.89 15.89,11.348
  region net 12V: 19.3,15.621 18.288,15.621 18.034,15.367 18.034,13.482 20.982,13.482 22,14.5 22,17.165 19.3,17.165
  pour cut-out: 30.48,55.753 30.48,28.067 34.925,28.067 41.315,28.067 41.275,33.68 41.326,33.731 41.377,33.782 41.656,33.782 41.91,33.782 42.672,33.782 44.45,33.782 45.847,35.179 45.847,40.894 44.323,42.418 34.925,42.418 34.925,56.317 34.29,55.753
  region net BATTERY_OUT: 80.75,13.5 87.25,13.5 87.25,29.25 80.75,29.25

## Silkscreen, mask and mechanical layers (free items; w line width, h text height)
Top Overlay:
  region: 22.25,72.5 22.25,69.75 23,69.75 23,67.25 32,67.25 32,69.75 32.5,69.75 32.5,72.25 22.25,72.25 22.25,72.5 32.75,72.5 32.75,69.75 32.75,66.75 23,66.75 21.5,66.75 21.5,72.5
  lines w0.254: 1.27,37.846 1.27,48.768 22.86,48.768 22.86,37.846 1.27,37.846 ; 16.002,49.53 30.226,49.53 30.226,56.642 16.002,56.642 16.002,49.53
  text "V G D C" at 23.25,67.5 h2.54
  text "DEBUG" at 1.524,62.992 h3.81
  text "SuperCap" at 16.764,61.976 h3.81
  text "20220528" at 17.018,59.436 h2.54
  text "V1.4" at 27.178,59.436 h2.54
  text "UC3843A" at 52.25,58 h7.62
  text "BoostOUT:26.5V" at 54.25,54 h3.81
  text "TAG" at 18.796,51.562 h5.08
  text "ID" at 10.414,41.656 h5.08
  text "VOUT GND GND VIN" at 55.5,12 h2.54
Bottom Overlay:
  lines w0.254: 28.5,13 51,13 51,50 28.5,50 28.5,13
  text "H" at 5.5,48.25 h2.54
  text "L" at 6.75,43 h2.54
  text "CAN" at 5.25,40 h2.54
Top Solder:
  region: 98,19.25 98,15 96.5,13.5 88,13.5 88,24.75 91.75,24.75 91.75,20.25 92.75,19.25
Bottom Solder:
  region: 76.073,40.386 76.073,34.544 78.613,34.544 78.613,40.386
  rectangle: 80.01,33.528 96.012,36.068
  region: 37.75,39.5 37.75,28.5 32.5,28.5 32.5,39.5
  region: 72.75,13.5 64.25,13.5 61.25,10.5 57.5,10.5 57.5,14.75 57.5,18.75 63.25,24.5 72.75,24.5
  region: 98,19.25 98,15 96.5,13.5 88,13.5 88,24.75 93.091,24.75 93.091,19.758 93.599,19.25
  region: 44.45,24.892 41.91,24.892 41.91,21.463 44.45,21.463
  lines w2: 38.989,20.828 38.989,5.715 42.418,2.286 71.882,2.286 74.74,5.144 74.74,9.5 ; 43.942,23.368 56.769,23.368 61.849,28.448 75.565,28.448 77.365,30.248 77.365,34.671
  lines w2.54: 32.75,29.75 32.75,53.25
  lines w3.81: 59.5,9.5 59.5,16